# Altium PCB PCB2.PcbDoc
Units mil, origin at the board's own origin, x right, y up, seen from the top; angles counter-clockwise.
Board outline 2362.2 x 885.83 mil, 2 copper layers (Top Layer, Bottom Layer); 18 components, 13 nets, 53 pads, 2 vias.
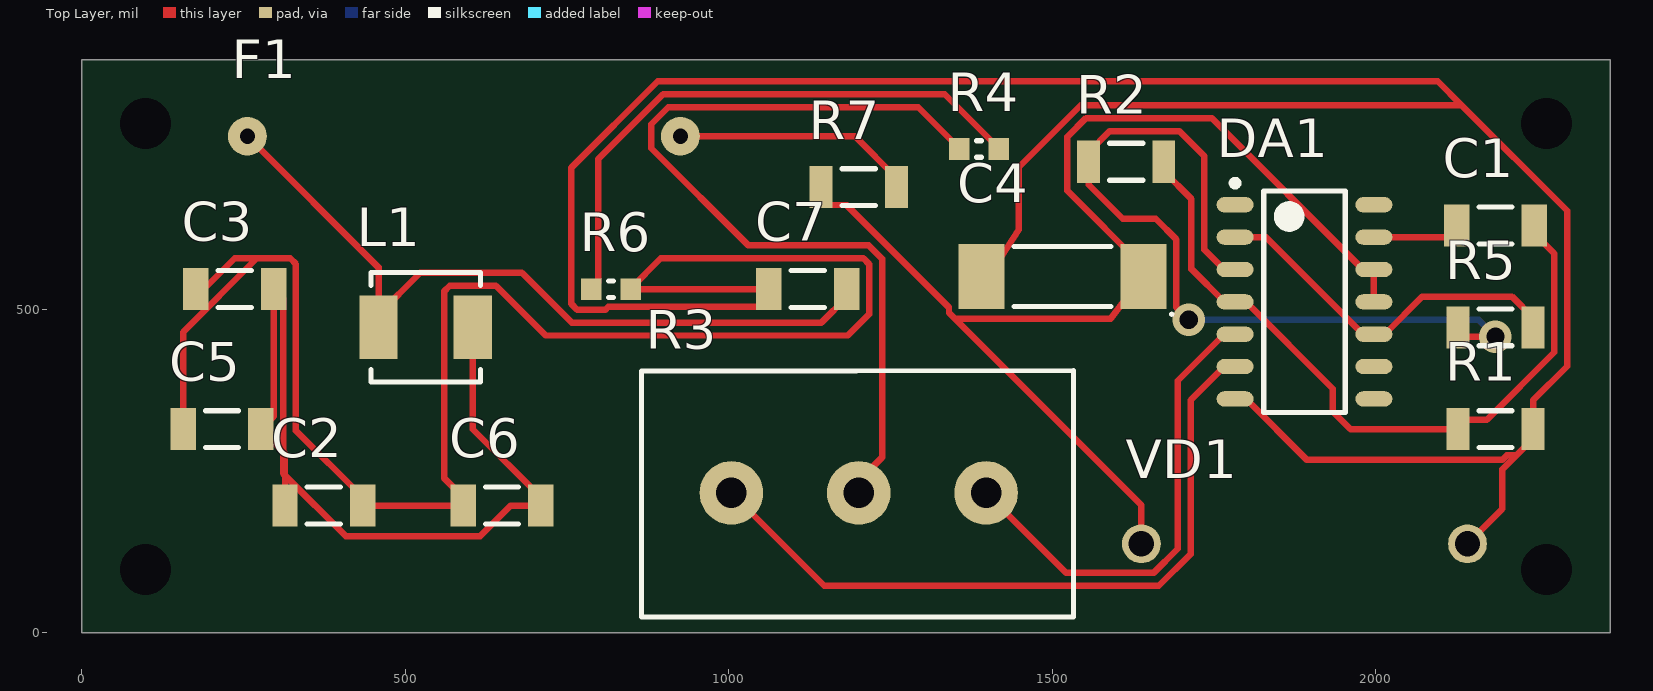
[diagram p0: Top Layer view]
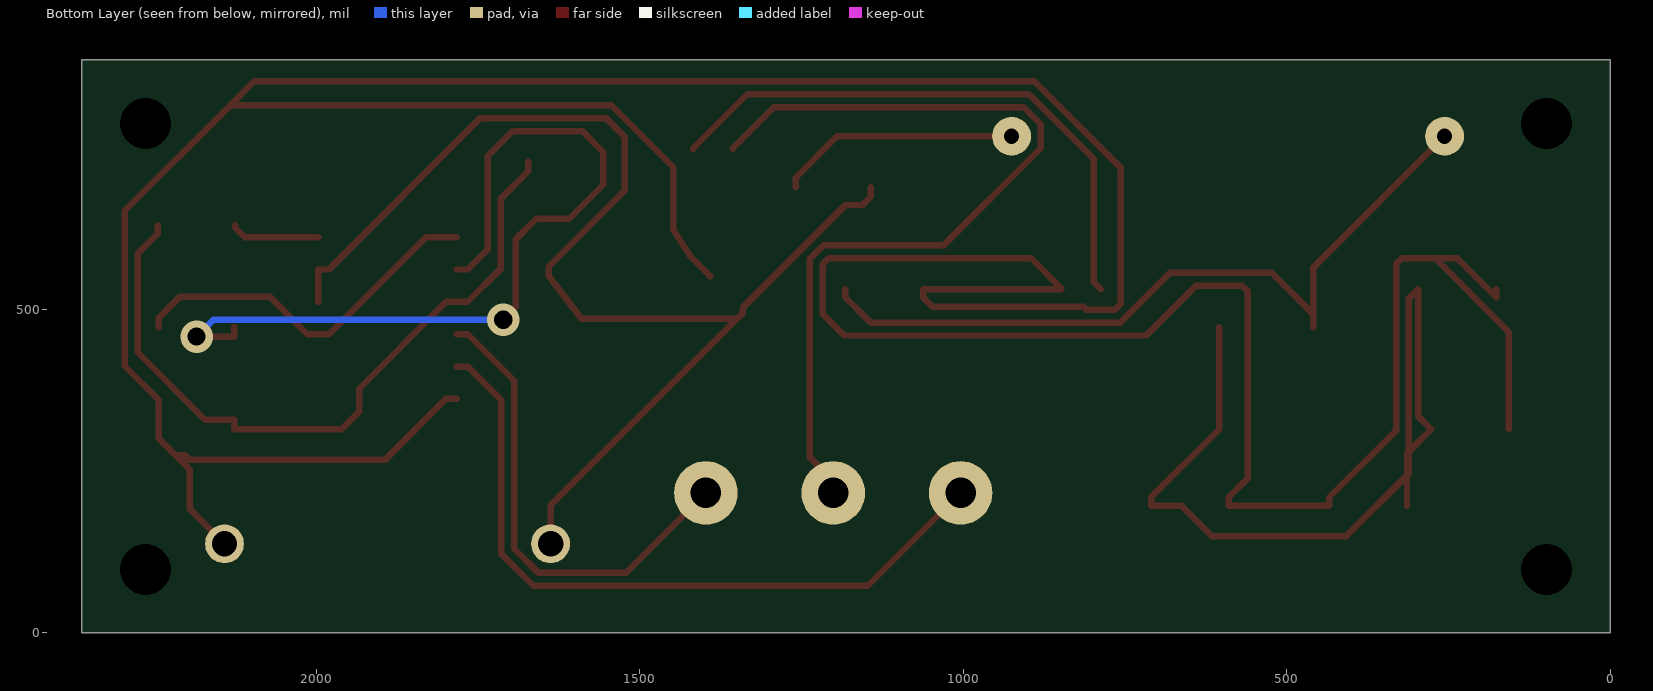
[diagram p1: Bottom Layer view, seen from below]
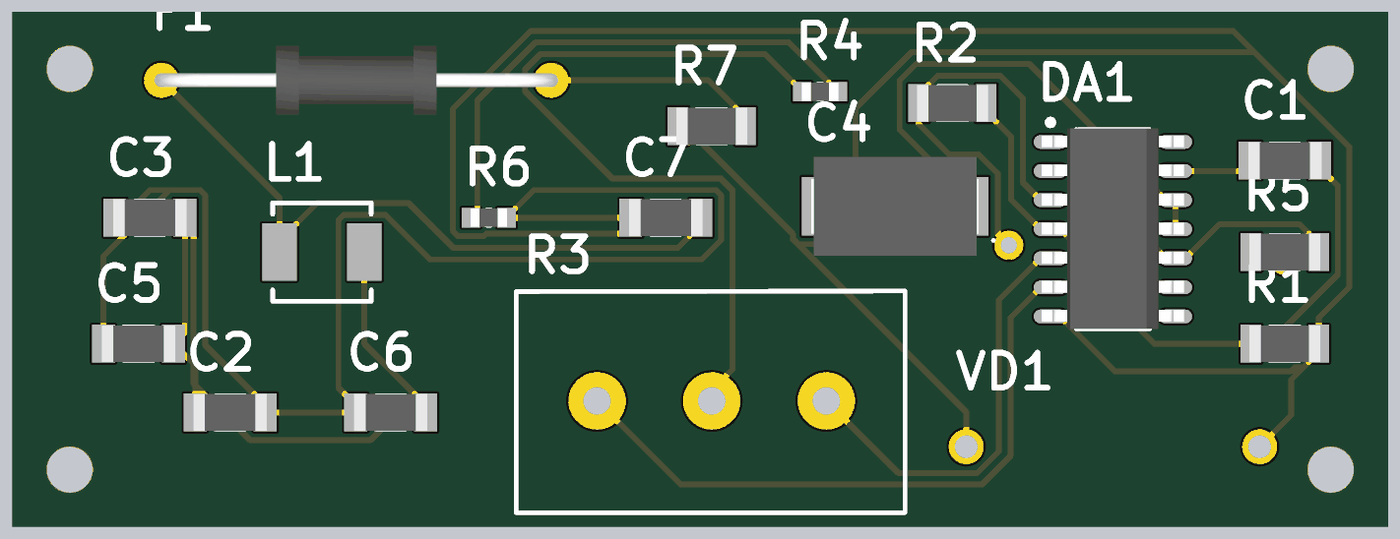
[diagram p2: 3D render of the assembled board from above, using the file's embedded part models]

## Layer stack, top to bottom
Top Solder: solder mask 0.4, Solder Resist, Dk 3.5
Top Layer: signal copper 1.4
Dielectric 1: dielectric 12.6, FR-4, Dk 4.8
Bottom Layer: signal copper 1.4
Bottom Solder: solder mask 0.4, Solder Resist, Dk 3.5

## Board outline
0,0 2362.2,0 2362.2,885.83 0,885.83

## Design rules (kind name [scope] priority, off if disabled: settings)
Clearance [All] p1: gap=10 ignorepadtopadclearanceinfootprint=FALSE except(0: Arc-Hole Track-Hole SMDPad-Hole THPad-Hole Via-Hole Fill-Hole Poly-Hole Region-Hole Text-Hole)
PolygonConnect [All] p1: connectstyle=Relief reliefconductorwidth=10 reliefentries=4 polygonreliefangle="90 Angle" airgapwidth=10
RoutingVias [All] p1: holewidth=28 width=50 viastyle="Through Hole" minholewidth=28 minwidth=50 maxholewidth=28 maxwidth=50
SolderMaskExpansion [All] p1: expansion=4
Width [All] p1: maxlimit=10 minlimit=10 preferedwidth=10
30 further rules are at their usual default settings.

## Components (designator, comment, footprint, x,y, rotation, side; value= is the part's Value field where it differs from the comment)
C1 "0.01 мкФ-5%-1206" 1206_cond 2185.04,629.92 r0 top
C2 "75 пкФ-5%-1206" 1206_cond 374.02,196.85 r0 top
C3 "0.01 мкФ-5%-1206" 1206_cond 236.22,531.5 r0 top
C4 "22 мкФ-10%- TAJD226K016R" TAJD 1515.75,551.18 r180 top
C5 "0.1 мкФ-5%-1206" 1206_cond 216.54,314.96 r0 top
C6 "0.01 мкФ-5%-1206" 1206_cond 649.61,196.85 r0 top
C7 "0.47мкФ-5%-1206" 1206_cond 1122.05,531.5 r0 top
DA1 "MC1723CP" SOIC-14 1889.76,511.81 r0 top
F1 "Fuse" F1 590.55,767.72 r180 top
L1 "10 мГн-10%-CSAB0420" Ind 531.5,472.44 r0 top
R1 "10 КОм-5%-1206" 1206 2185.04,314.96 r0 top
R2 "82 КОм-5%-1206" 1206 1614.17,728.35 r0 top
R3 "1 КОм-10%-16K1-10C10K" 16K1 1200.79,216.54 r0 top
R4 "5 КОм-5%-NCP18XW153J03RB" Term 1386.81,748.03 r0 top
R5 "10 КОм-5%-1206" 1206 2185.04,472.44 r0 top
R6 "5 КОм-5%-NCP18XW153J03RB" Term 817.91,531.5 r0 top
R7 "470 Ом-5%-1206" 1206 1200.79,688.98 r0 top
VD1 "1N5357B" Stab 1889.76,137.8 r180 top

## Footprints (in the part's own frame and the unit in brackets; to place one, negate y for a bottom-side part, rotate by r counter-clockwise, add the part's x,y. Pads: shape width x height; smd on the part's side, far side on the other; paste and mask are expansions set on the pad)
16K1 [mm]
  round 2.5 hole 1.2 mask+0.102: 1(-5,0) 2(0,0) 3(5,0)
  silkscreen extent -8.52,-4.87 8.43,4.8, body extent -8.52,-19.4 8.47,4.9, height 22.5
1206 [mm] "Chip Resistor, 2-Leads, Body 3,10x1,60mm, IPC Medium Density"
  rect 0.9x1.65 smd: 0(-1.475,0) 1(1.475,0)
  silkscreen extent -0.65,-0.73 0.65,0.73, body extent -1.55,-0.8 1.55,0.8, height 0.54
1206_cond [mm]
  rect 1x1.65 smd: 0(-1.525,0) 1(1.525,0)
  silkscreen extent -0.65,-0.72 0.65,0.72, body extent -1.6,-0.8 1.6,0.8, height 1.49
F1 [mil]
  round 60 hole 23.62: 0(-334.65,0) 1(334.64,0)
  body extent -346,-59 346,59, height 236
Ind [mm] "Molded Inductor, 2-Leads, Body 4,20x4,20mm, IPC Medium Density"
  rect 1.5x2.5 smd: 0(-1.85,0) 1(1.85,0)
  silkscreen extent -2.15,-2.15 2.15,2.15, body extent -2.2,-2.04 2.2,2.16, height 1.74
SOIC-14 [mm] "SOIC, 14-Leads, Body 8,60x3,90mm, Pitch 1,27mm, IPC Medium Density"
  oval 1.45x0.6 smd: 1(-2.725,3.81) 2(-2.725,2.54) 3(-2.725,1.27) 4(-2.725,0) 5(-2.725,-1.27) 6(-2.725,-2.54) 7(-2.725,-3.81) 8(2.725,-3.81) 9(2.725,-2.54) 10(2.725,-1.27) 11(2.725,0) 12(2.725,1.27) 13(2.725,2.54) 14(2.725,3.81)
  silkscreen extent -2.85,-4.35 1.6,4.78, body extent -3.1,-4.35 3.1,4.4, height 1.74
Stab [mil]
  round 60 hole 39.37: 0(-251.97,0) 1(251.97,0)
  body extent -272,-71 272,71, height 248
TAJD [mm] "Chip Capacitor, 2-Leads, Body 7,30x2,40mm, IPC Medium Density"
  rect 1.8x2.55 smd: 0(-3.175,0) 1(3.175,0)
  silkscreen extent -4.34,-1.17 1.9,1.54, body extent -3.65,-2.15 3.65,2.15, height 2.89
Term [mm] "Chip Resistor, 2-Leads, Body 1,60x0,80mm, IPC Medium Density"
  rect 0.8x0.85 smd: 0(-0.775,0) 1(0.775,0)
  silkscreen extent -0.1,-0.32 0.1,0.32, body extent -0.8,-0.4 0.8,0.4, height 0.78

## Part data
C1 C2 C3 C5 C6 C7: library part Cap_1206C
C4: library part Cap_pol
F1: library part F1
L1: library part Inductor_0603L
R1 R2 R5 R7: library part "Resistor 1206R"
R3: library part Resistor_per
R4 R6: library part Term
VD1: library part Stab

## Free pads (board coordinates)
  round 60 hole 78.74: 3(98.42,98.42) 3(98.42,787.4) 3(2263.78,98.42) 3(2263.78,787.4)

## Via types
v1: diameter 50, hole 28, Top Layer to Bottom Layer, 2 vias

## Nets (pads, with @x,y where several pads share a name; then routed paths per layer and width w, separated by ;. In a path a pad name is that pad's centre, name@x,y a point inside that pad or via, vN(x,y) a via of type N, cw(c..) or ccw(c..) an arc to the next point about the centre after c; other vN are vias at no path point)
GND: C2.1 C3.0 C4.1 C5.0 C6.0 C7.0 DA1.7 R1.1 R6.1 VD1.0 | length 6998.5
  Top Layer w10: C5.0 156.5,465.11 270.36,578.98 ; C3.0 176.18,518.7 236.46,578.98 270.36,578.98 ; C4.1 1421.18,581.61 1448.07,623.27 1448.07,720.01 1543.89,815.83 2132.55,815.83 ; DA1.7 1799.21,361.81 1893.54,267.48 2195.63,267.48 2202.7,274.55 2217.46,274.55 ; VD1.0 2195.63,191.69 2195.63,252.71 2217.46,274.55 ; 270.36,578.98 322.16,578.98 330.94,570.19 330.94,312.76 434.05,209.65 C2.1 C6.0 589.57,209.65 559.8,239.41 559.8,527.87 568.59,536.65 640.07,536.65 716.96,459.76 1183.73,459.76 1216.77,492.8 1216.77,570.19 1207.98,578.98 894.92,578.98 848.42,532.48 R6.1 C7.0 1062.01,518.7 1047.32,504.02 813.61,504.02 809.36,499.76 765.44,499.76 756.65,508.55 756.65,719.38 889.99,852.72 2095.66,852.72 2132.55,815.83 ; 2132.55,815.83 2295.83,652.55 2295.83,412.41 2243.11,359.69 R1.1 2243.11,300.2 2217.46,274.55
NetC1_0: C1.0 DA1.13 | length 137.5
  Top Layer w10: DA1.13 2110.31,611.81 2125,626.5 C1.0
NetC1_1: C1.1 DA1.4 R1.0 R2.1 | length 1134.2
  Top Layer w10: R2.1 1672.24,713.58 1715.06,670.77 1715.06,562.5 1765.75,511.81 DA1.4 1799.21,511.81 1933.5,377.52 1933.5,342.42 1960.96,314.96 R1.0 2126.97,329.72 2171.8,329.72 2275.83,433.75 2275.83,586.38 2245.08,617.13 C1.1
NetC2_0: C2.0 C3.1 C5.1 C6.1 L1.1 | length 1427.1
  Top Layer w10: C2.0 313.98,243.55 ; L1.1 604.33,314.96 709.65,209.65 C6.1 662.95,196.85 615.46,149.37 408.16,149.37 313.98,243.55 ; 310.94,280.59 310.94,516.81 C3.1 296.26,334.65 C5.1 310.94,280.59 ; 310.94,280.59 310.94,246.58 313.98,243.55 ; 310.94,280.59 313.98,277.56 313.98,243.55
NetC4_0: C4.0 DA1.11 DA1.12 R7.0 VD1.1 | length 1992.5
  Top Layer w10: R7.0 1142.72,674.21 1155.43,661.5 1182.03,661.5 1340.31,503.21 1340.31,494.77 1349.1,485.98 ; VD1.1 1637.79,197.29 1349.1,485.98 ; DA1.11 DA1.12 1980.31,561.81 1746.3,795.83 1552.17,795.83 1523.39,767.04 1523.39,683.31 1640.75,565.94 C4.0 1637.79,548.23 1590.31,485.98 1349.1,485.98
NetC7_1: C7.1 F1.1 L1.0 | length 1190.2
  Top Layer w10: F1.1 458.66,564.96 L1.0@458.66,492.13 ; L1.0 L1.0@458.66,492.13 ; C7.1 1182.09,518.7 1143.15,479.76 757.16,479.76 680.27,556.65 523.19,556.65 L1.0@458.66,492.13
NetDA1_2: DA1.2 DA1.10 R5.1 | length 575.1
  Top Layer w10: DA1.2 1830.31,611.81 1980.31,461.81 DA1.10 2013.78,461.81 2071.89,519.92 2210.39,519.92 2243.11,487.2 R5.1
NetDA1_3: DA1.3 R2.0 R5.0 | length 1323.2
  Top Layer w10: v1(1710.84,484.09) 1691.84,503.09 1691.84,608.09 1659.84,640.09 1608.84,640.09 1556.1,692.83 R2.0 1556.1,743.11 1588.82,775.83 1696.17,775.83 1735.06,736.94 1735.06,592.5 1765.75,561.81 DA1.3 ; R5.0 2126.97,458.09 v1(2184.84,458.09)
  Bottom Layer w10: v1(1710.84,484.09) 2158.84,484.09 v1(2184.84,458.09)
NetDA1_5: DA1.5 R3.3 | length 741.1
  Top Layer w10: R3.3 1521.38,92.79 1656.43,92.79 1693.93,130.29 1693.93,389.99 1765.75,461.81 DA1.5
NetDA1_6: DA1.6 R3.1 | length 1117.9
  Top Layer w10: R3.1 1147.68,72.79 1664.72,72.79 1713.93,122.01 1713.93,359.99 1765.75,411.81 DA1.6
NetF1_0: F1.0 R7.1 | length 374.9
  Top Layer w10: F1.0 1194.88,767.72 1258.86,703.74 R7.1
NetR3_2: R3.2 R4.0 | length 1355.8
  Top Layer w10: R3.2 1200.79,235.38 1236.77,271.36 1236.77,578.47 1216.27,598.98 1030.3,598.98 880.2,749.08 880.2,786.36 906.56,812.72 1292.6,812.72 1356.3,749.02 R4.0
NetR4_1: R4.1 R6.0 | length 901.8
  Top Layer w10: R6.0 798.15,542.24 798.15,732.59 898.27,832.72 1333.62,832.72 1417.32,749.02 R4.1
pads on no net: DA1.1 DA1.8 DA1.9 DA1.14

## Silkscreen, mask and mechanical layers (free items; w line width, h text height)
Mechanical 1:
  the board outline again, w10